# EAGLE board TwixBC (EAGLE 5.06)
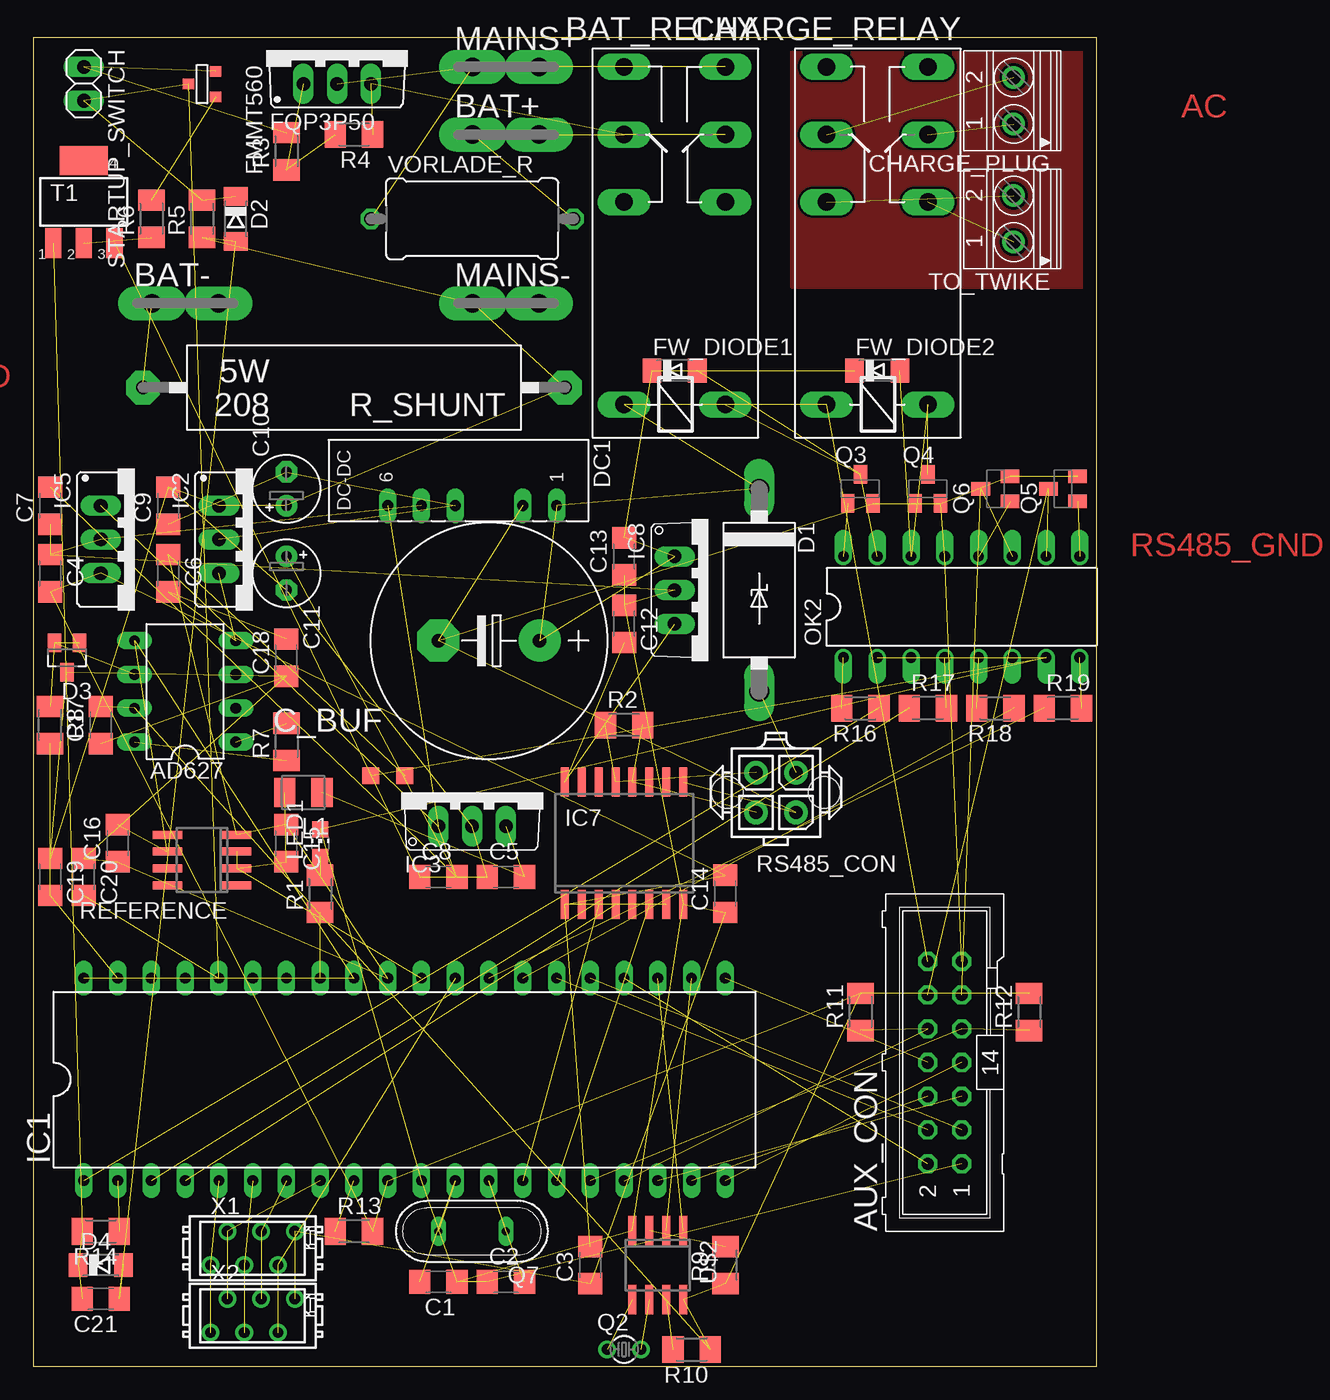
[diagram p0: board, top side]

Size 80 x 100 mm. Coordinates in mm from the lower left corner, seen from the top.
Outline: 0,0 80,0 80,100 0,100 0,0
Copper layers (1*16): Top 0.035mm / dielectric 1.5mm / Bottom 0.035mm
Design rules "default": minimum track width 10mil, minimum drill 24mil, track to track 8mil, track to pad 8mil, pad to pad 8mil, via to via 8mil, smd to smd 8mil, copper to edge 40mil, drill to drill 8mil, minimum pad ring 10mil, minimum via ring 8mil, stop-mask expansion 4mil, vias tented up to drill 0mil, thermal gap 10mil

## Footprints (pad centres in the part's own frame; a part is rotated, then mirrored left to right if it is on the bottom)
DIL08 = drill 0.813 long: 1 -3.81,-3.81; 2 -1.27,-3.81; 3 1.27,-3.81; 4 3.81,-3.81; 5 3.81,3.81; 6 1.27,3.81; 7 -1.27,3.81; 8 -3.81,3.81
ML14 = drill 0.914 octagon: 1 -7.62,-1.27; 2 -7.62,1.27; 3 -5.08,-1.27; 4 -5.08,1.27; 5 -2.54,-1.27; 6 -2.54,1.27; 7 0,-1.27; 8 0,1.27; 9 2.54,-1.27; 10 2.54,1.27; 11 5.08,-1.27; 12 5.08,1.27; 13 7.62,-1.27; 14 7.62,1.27
F061.100 = drill 1.4 pad 2.54 long: A1 -2.5,0; A2 2.5,0
F4052 = drill 1.321 long: 1 -3.81,3.81; 2 -3.81,-3.81; O1 11.43,-3.81; O2 11.43,3.81; P1 16.51,-3.81; P2 16.51,3.81; S1 21.59,-3.81; S2 21.59,3.81
C1206 = smd 1.6 x 1.8: 1 -1.4,0; 2 1.4,0
E2,5-5 = drill 0.813 pad 1.6 round: + -1.27,0 | drill 0.813 pad 1.6 octagon: - 1.27,0
E7,5-18 = drill 1.016 pad 3.15 round: + -3.81,0 | drill 1.016 pad 3.15 octagon: - 3.81,0
1751248 = drill 1.1 pad 1.7 round: 1 -1.75,-0.1; 2 1.75,-0.1
C4111-15 = drill 1.499 long: A 7.62,0; C -7.62,0
SOD80C = smd 1.4 x 1.8: A 1.7,0; C -1.7,0
SOT23 = smd 1 x 1.4: 1 -0.95,-1.1; 2 0.95,-1.1; 3 0,1.1
NMA = drill 0.813 long: 1 0,6.35; 2 0,3.81; 4 0,-1.27; 5 0,-3.81; 6 0,-6.35
SOT-23 = smd 0.787 x 0.889: 1 0.025,-1.016; 2 -0.94,1.016; 3 0.991,1.016
TO220BV = drill 1.016 long: D 0,-2.54; G -2.54,-2.54; S 2.54,-2.54
MINIMELF = smd 1.4 x 1.8: A 1.7,0; C -1.7,0
DIL40 = drill 0.813 long: 1 -24.13,-7.62; 2 -21.59,-7.62; 3 -19.05,-7.62; 4 -16.51,-7.62; 5 -13.97,-7.62; 6 -11.43,-7.62; 7 -8.89,-7.62; 8 -6.35,-7.62; 9 -3.81,-7.62; 10 -1.27,-7.62; 11 1.27,-7.62; 12 3.81,-7.62; 13 6.35,-7.62; 14 8.89,-7.62; 15 11.43,-7.62; 16 13.97,-7.62; 17 16.51,-7.62; 18 19.05,-7.62; 19 21.59,-7.62; 20 24.13,-7.62; 21 24.13,7.62; 22 21.59,7.62; 23 19.05,7.62; 24 16.51,7.62; 25 13.97,7.62; 26 11.43,7.62; 27 8.89,7.62; 28 6.35,7.62; 29 3.81,7.62; 30 1.27,7.62; 31 -1.27,7.62; 32 -3.81,7.62; 33 -6.35,7.62; 34 -8.89,7.62; 35 -11.43,7.62; 36 -13.97,7.62; 37 -16.51,7.62; 38 -19.05,7.62; 39 -21.59,7.62; 40 -24.13,7.62
79XXS = drill 1.016 long: GND -2.54,-2.54; IN 0,-2.54; OUT 2.54,-2.54
TO220V = drill 1.016 long: 1 -2.54,-2.54; 2 0,-2.54; 3 2.54,-2.54
78XXS = drill 1.016 long: GND 0,-2.54; IN -2.54,-2.54; OUT 2.54,-2.54
SO16W = smd 0.6 x 2.2: 1 -4.445,-4.6; 2 -3.175,-4.6; 3 -1.905,-4.6; 4 -0.635,-4.6; 5 0.635,-4.6; 6 1.905,-4.6; 7 3.175,-4.6; 8 4.445,-4.6; 9 4.445,4.6; 10 3.175,4.6; 11 1.905,4.6; 12 0.635,4.6; 13 -0.635,4.6; 14 -1.905,4.6; 15 -3.175,4.6; 16 -4.445,4.6
L3225M = smd 1.6 x 2.2: 1 -1.4,0; 2 1.4,0
CHIP-LED0805 = smd 1.2 x 1.2: A 0,-1.05; C 0,1.05
DIL16 = drill 0.813 offset: 1 -8.89,-3.81; 2 -6.35,-3.81; 3 -3.81,-3.81; 4 -1.27,-3.81; 5 1.27,-3.81; 6 3.81,-3.81; 7 6.35,-3.81; 8 8.89,-3.81; 9 8.89,3.81; 10 6.35,3.81; 11 3.81,3.81; 12 1.27,3.81; 13 -1.27,3.81; 14 -3.81,3.81; 15 -6.35,3.81; 16 -8.89,3.81
TC26V = drill 0.813 round: 1 -1.27,0; 2 1.27,0
SOT23-BEC = smd 1 x 1.4: B -0.95,-1.1; C 0,1.1; E 0.95,-1.1
QS = drill 0.61 long: 1 -2.54,0; 2 2.54,0
M1206 = smd 1.6 x 2: 1 -1.4,0; 2 1.4,0
KH208-8 = drill 1.016 pad 2.54 octagon: 1 -15.875,0; 2 15.875,0
SO08 = smd 0.6 x 2.2: 1 -1.905,-2.6; 2 -0.635,-2.6; 3 0.635,-2.6; 4 1.905,-2.6; 5 1.905,2.6; 6 0.635,2.6; 7 -0.635,2.6; 8 -1.905,2.6
794681-4 = drill 1 pad 1.778 round: 1 1.5,-1.5; 2 1.5,1.5; 3 -1.5,-1.5; 4 -1.5,1.5 | hole 2.4: 3.63,0; -3.67,0
1X02 = drill 1.016 long: 1 -1.27,0; 2 1.27,0
SOT223 = smd 1.219 x 2.235: 1 -2.311,-3.099; 2 0,-3.099; 3 2.311,-3.099 | smd 3.6 x 2.2: 4 0,3.099
S08 = smd 0.6 x 2.2: 1 0.635,1.21; 2 1.905,1.21; 3 3.175,1.21; 4 4.445,1.21; 5 4.445,6.41; 6 3.175,6.41; 7 1.905,6.41; 8 0.635,6.41
RDH/15 = drill 1.016 octagon: 1 -7.62,0; 2 7.62,0
MICROMATCH-6 = drill 0.813 round: 1 3.175,1.27; 2 1.905,-1.27; 3 0.635,1.27; 4 -0.635,-1.27; 5 -1.905,1.27; 6 -3.175,-1.27
GND-GNDA = smd 1.27 x 1.27: GND -1.27,0; GNDA 1.27,0

## Placement (x,y rotation side)
AD627  AD627  [DIL08]  11.43,50.8 90 top
AUX_CON  [ML14]  68.58,22.86 90 top
BAT+  PIN2F061.100  [F061.100]  35.56,92.71 0 top
BAT-  PIN2F061.100  [F061.100]  11.43,80.01 0 top
BAT_RELAY  4052  [F4052]  48.26,76.2 90 top
C1  18p  [C1206]  30.48,6.35 180 top
C2  18p  [C1206]  35.56,6.35 0 top
C3  100n  [C1206]  41.91,7.62 90 top
C4  100n  [C1206]  1.27,59.69 270 top
C5  100n  [C1206]  35.56,36.83 0 top
C6  100n  [C1206]  10.16,59.69 270 top
C7  100n  [C1206]  1.27,64.77 90 top
C8  100n  [C1206]  30.48,36.83 0 top
C9  100n  [C1206]  10.16,64.77 90 top
C10  10u  [E2,5-5]  19.05,66.04 90 top
C11  10u  [E2,5-5]  19.05,59.69 270 top
C12  100n  [C1206]  44.45,55.88 270 top
C13  100n  [C1206]  44.45,60.96 90 top
C14  100n  [C1206]  52.07,35.56 90 top
C15  100n  [C1206]  19.05,39.37 270 top
C16  100n  [C1206]  6.35,39.37 90 top
C17  100n  [C1206]  5.08,48.26 90 top
C18  100n  [C1206]  19.05,53.34 90 top
C19  100n  [C1206]  1.27,36.83 270 top
C20  100n  [C1206]  3.81,36.83 270 top
C21  100n  [C1206]  5.08,5.08 180 top
C_BUF  [E7,5-18]  34.29,54.61 180 top
CHARGE_PLUG  1751248  [1751248]  73.66,95.25 90 top
CHARGE_RELAY  4052  [F4052]  63.5,76.2 90 top
D1  1N5908  [C4111-15]  54.61,58.42 270 top
D2  [SOD80C]  15.24,86.36 270 top
D3  BAS40-06  [SOT23]  2.54,53.34 180 top
D4  [SOD80C]  5.08,7.62 0 top
DC1  12-12  [NMA]  33.02,64.77 270 top
FMMT560  [SOT-23]  12.7,96.52 270 top
FQP3P50  [TO220BV]  22.86,99.06 0 top
FW_DIODE1  [MINIMELF]  48.26,74.93 0 top
FW_DIODE2  [MINIMELF]  63.5,74.93 0 top
IC1  MEGA32-P  [DIL40]  27.94,21.59 0 top
IC2  TS7905  [79XXS]  16.51,62.23 270 top
IC3  7805TV  [TO220V]  33.02,43.18 0 top
IC5  TS7805  [78XXS]  7.62,62.23 270 top
IC7  ADM2483  [SO16W]  44.45,39.37 0 top
IC8  7805TV  [TO220V]  50.8,58.42 270 top
L1  [L3225M]  20.32,43.18 180 top
LED1  [CHIP-LED0805]  21.59,39.37 0 top
MAINS+  PIN2F061.100  [F061.100]  35.56,97.79 0 top
MAINS-  PIN2F061.100  [F061.100]  35.56,80.01 0 top
OK2  ILQ1  [DIL16]  69.85,57.15 0 top
Q2  32678 kHz  [TC26V]  44.45,1.27 0 top
Q3  BC817-16SMD  [SOT23-BEC]  62.23,66.04 0 top
Q4  BC817-16SMD  [SOT23-BEC]  67.31,66.04 0 top
Q5  BC817-16SMD  [SOT23-BEC]  77.47,66.04 90 top
Q6  BC817-16SMD  [SOT23-BEC]  72.39,66.04 90 top
Q7  16MHz  [QS]  33.02,10.16 180 top
R1  390  [M1206]  21.59,35.56 90 top
R2  120  [M1206]  44.45,48.26 0 top
R3  1990k  [M1206]  19.05,91.44 90 top
R4  100k  [M1206]  24.13,92.71 180 top
R5  10k  [M1206]  12.7,86.36 90 top
R6  1M  [M1206]  8.89,86.36 90 top
R7  17k8  [M1206]  19.05,46.99 90 top
R8  10k  [M1206]  1.27,48.26 270 top
R9  10k  [M1206]  52.07,7.62 90 top
R10  10k  [M1206]  49.53,1.27 180 top
R11  10k  [M1206]  62.23,26.67 90 top
R12  10k  [M1206]  74.93,26.67 90 top
R13  10k  [M1206]  24.13,10.16 0 top
R14  100k  [M1206]  5.08,10.16 180 top
R16  390  [M1206]  62.23,49.53 180 top
R17  390  [M1206]  67.31,49.53 0 top
R18  390  [M1206]  72.39,49.53 180 top
R19  390  [M1206]  77.47,49.53 0 top
R_SHUNT  0.005  [KH208-8]  24.13,73.66 180 top
REFERENCE  [SO08]  12.7,38.1 90 top
RS485_CON  794681-4  [794681-4]  55.88,43.18 0 top
STARTUP_SWITCH  [1X02]  3.81,96.52 270 top
T1  [SOT223]  3.81,87.63 0 top
TO_TWIKE  1751248  [1751248]  73.66,86.36 90 top
U$2  DS1629  [S08]  49.53,11.43 180 top
VORLADE_R  [RDH/15]  33.02,86.36 0 top
X1  MICROMATCH-6  [MICROMATCH-6]  16.51,8.89 0 top
X2  MICROMATCH-6  [MICROMATCH-6]  16.51,3.81 0 top
~NUDEV~1  GND-GNDA  [GND-GNDA]  26.67,44.45 0 top

## Library data of the parts
AD627 = analog-devices
AUX_CON = con-ml
BAT+ BAT- MAINS+ MAINS- = con-faston
BAT_RELAY CHARGE_RELAY = relay
C1-C21 C_BUF L1 R1-R14 R16-R19 VORLADE_R = rcl
CHARGE_PLUG TO_TWIKE = con-phoenix-350
D1-D4 FW_DIODE1 FW_DIODE2 = diode
DC1 = dc-dc-converter
FMMT560 T1 = zetex
FQP3P50 = transistor-power
IC1 = atmel
IC2 IC5 = v-reg
IC3 IC8 = linear
IC7 REFERENCE = Libs_Markus
LED1 = led
OK2 = optocoupler
Q2 = crystal
Q3-Q6 = transistor-npn
Q7 = special
R_SHUNT = resistor-power
RS485_CON = con-amp
STARTUP_SWITCH = pinhead
U$2 = DS1629
X1 X2 = con-amp-micromatch
~NUDEV~1 = supply1

## Nets
ADC_HV: C20.2 D2.C FMMT560.1 IC1.36 R5.2 STARTUP_SWITCH.2
AUX: AUX_CON.12 OK2.10 Q5.C
AUX_EN: IC1.28 R19.1
BAT_RELAY_EN: IC1.1 R16.1
BUT_1: AUX_CON.9 IC1.16 R12.1
BUT_2: AUX_CON.10 IC1.17 R11.1
CHARGE_RELAY_EN: IC1.3 R17.1
CS: IC1.5 X1.6 X2.6
DISP_DB4: AUX_CON.5 IC1.18
DISP_DB5: AUX_CON.6 IC1.19
DISP_DB6: AUX_CON.7 IC1.20
DISP_DB7: AUX_CON.8 IC1.21
DISP_EN_PWR: AUX_CON.4 IC1.26
DISP_RS: AUX_CON.2 IC1.24
DISP_RW: AUX_CON.3 IC1.25
GND: AUX_CON.1 C1.1 C2.1 C3.1 C4.1 C7.1 C12.1 C13.1 C14.1 DC1.5 IC1.11 IC5.GND IC7.8 IC8.2 LED1.C OK2.2 OK2.3 OK2.6 OK2.7 U$2.4 X1.1 X2.1 ~NUDEV~1.GND
GNDA: C5.1 C6.1 C8.1 C9.2 C10.+ C11.- C15.1 C16.1 C17.1 C18.1 C19.1 C20.1 C21.1 D2.A D3.3 D4.A IC1.31 IC2.GND IC3.2 MAINS-.A1 R5.1 R_SHUNT.1 REFERENCE.4 T1.3 ~NUDEV~1.GNDA
ISO_EN: IC1.29 X1.2 X2.2
MAINS+: BAT_RELAY.S1 BAT_RELAY.S2 FQP3P50.D MAINS+.A1 VORLADE_R.1
MISO: IC1.7 X1.3 X2.3
MOSI: IC1.6 X1.4 X2.4
N$1: IC1.33 R1.1
N$2: FMMT560.2 R3.2 STARTUP_SWITCH.1
N$3: FMMT560.3 R6.2
N$4: FQP3P50.G R3.1 R4.2
N$5: R6.1 T1.2
N$8: C21.2 D4.C R14.2 T1.1
N$18: C1.2 IC1.12 Q7.2
N$22: C2.2 IC1.13 Q7.1
N$24: BAT+.A1 BAT+.A2 BAT_RELAY.P1 BAT_RELAY.P2 FQP3P50.S R4.1 VORLADE_R.2
N$25: BAT_RELAY.2 FW_DIODE1.A OK2.15 Q3.C
N$26: IC7.12 R2.2 RS485_CON.3
N$27: IC7.13 R2.1 RS485_CON.4
N$28: C12.2 IC7.16 IC8.3
N$29: C15.2 IC1.30 L1.2 REFERENCE.2 REFERENCE.3
N$30: AD627.6 D3.1 D3.2 R8.1
N$31: C7.2 C8.2 C11.+ DC1.6 IC3.1 IC5.IN
N$32: C9.1 C10.- DC1.4 IC2.IN
N$33: AD627.1 R7.2
N$34: AD627.8 R7.1
N$35: C19.2 IC1.37 IC1.39 R8.2
N$36: R10.2 U$2.7
N$37: R9.2 U$2.3
N$38: IC1.9 R13.1
N$40: Q2.2 U$2.6
N$41: Q2.1 U$2.5
N$42: OK2.16 Q3.B
N$43: OK2.1 R16.2
N$44: OK2.4 R17.2
N$45: CHARGE_PLUG.1 CHARGE_RELAY.P1
N$46: CHARGE_PLUG.2 CHARGE_RELAY.P2
N$47: CHARGE_RELAY.2 FW_DIODE2.A OK2.14 Q4.C
N$48: CHARGE_RELAY.O1 TO_TWIKE.1
N$49: CHARGE_RELAY.O2 TO_TWIKE.2
N$50: OK2.5 R18.2
N$52: OK2.8 R19.2
N$53: LED1.A R1.2
N$54: OK2.9 Q5.B
N$65: OK2.12 Q6.B
NOTAUS: AUX_CON.11 OK2.11 Q6.C
NOTAUS_EN: IC1.27 R18.1
RS485_INPUT_DE: IC1.4 IC7.4 IC7.5
RXD: IC1.14 IC7.3
SCK: IC1.8 X1.5 X2.5
SCL: IC1.22 U$2.2
SDA: IC1.23 U$2.1
SOFT_SW_EN: IC1.2 R14.1
TWIKE_DCDC+: D1.A RS485_CON.2
TWIKE_DCDC-: AUX_CON.13 C_BUF.- DC1.2 IC7.9 OK2.13 Q3.E Q4.B Q4.E Q5.E Q6.E RS485_CON.1
TWIKE_DCDC_BUF: AUX_CON.14 BAT_RELAY.1 C13.2 C_BUF.+ CHARGE_RELAY.1 D1.C DC1.1 FW_DIODE1.C FW_DIODE2.C IC8.1
TXD: IC1.15 IC7.6
U_REF: AD627.5 C16.2 IC1.32 IC1.38 IC1.40 REFERENCE.6
U_SHUNT: BAT-.A1 R_SHUNT.2
VCC: AD627.7 C3.2 C4.2 C14.2 C17.2 IC1.10 IC5.OUT IC7.1 IC7.7 R9.1 R10.1 R11.2 R12.2 R13.2 U$2.8
VDD: C5.2 IC3.3 L1.1
VSS: AD627.4 C6.2 C18.2 IC2.OUT

## Tracks (layer width: path | path; a pad name or v marks a point on that pad's centre or on a via)
ADC_HV  (5 unrouted)
AUX  (2 unrouted)
AUX_EN  (1 unrouted)
BAT_RELAY_EN  (1 unrouted)
BUT_1  (2 unrouted)
BUT_2  (2 unrouted)
CHARGE_RELAY_EN  (1 unrouted)
CS  (2 unrouted)
DISP_DB4  (1 unrouted)
DISP_DB5  (1 unrouted)
DISP_DB6  (1 unrouted)
DISP_DB7  (1 unrouted)
DISP_EN_PWR  (1 unrouted)
DISP_RS  (1 unrouted)
DISP_RW  (1 unrouted)
GND  (22 unrouted)
GNDA  (24 unrouted)
ISO_EN  (2 unrouted)
MAINS+  (4 unrouted)
MISO  (2 unrouted)
MOSI  (2 unrouted)
N$1  (1 unrouted)
N$2  (2 unrouted)
N$3  (1 unrouted)
N$4  (2 unrouted)
N$5  (1 unrouted)
N$8  (3 unrouted)
N$9
  pour Top: 57.15,100.33 57.15,81.28 80.01,81.28 80.01,100.33 58.42,100.33
N$18  (2 unrouted)
N$22  (2 unrouted)
N$24  (6 unrouted)
N$25  (3 unrouted)
N$26  (2 unrouted)
N$27  (2 unrouted)
N$28  (2 unrouted)
N$29  (4 unrouted)
N$30  (3 unrouted)
N$31  (5 unrouted)
N$32  (3 unrouted)
N$33  (1 unrouted)
N$34  (1 unrouted)
N$35  (3 unrouted)
N$36  (1 unrouted)
N$37  (1 unrouted)
N$38  (1 unrouted)
N$40  (1 unrouted)
N$41  (1 unrouted)
N$42  (1 unrouted)
N$43  (1 unrouted)
N$44  (1 unrouted)
N$45  (1 unrouted)
N$46  (1 unrouted)
N$47  (3 unrouted)
N$48  (1 unrouted)
N$49  (1 unrouted)
N$50  (1 unrouted)
N$52  (1 unrouted)
N$53  (1 unrouted)
N$54  (1 unrouted)
N$65  (1 unrouted)
NOTAUS  (2 unrouted)
NOTAUS_EN  (1 unrouted)
RS485_INPUT_DE  (2 unrouted)
RXD  (1 unrouted)
SCK  (2 unrouted)
SCL  (1 unrouted)
SDA  (1 unrouted)
SOFT_SW_EN  (1 unrouted)
TWIKE_DCDC+  (1 unrouted)
TWIKE_DCDC-  (10 unrouted)
TWIKE_DCDC_BUF  (9 unrouted)
TXD  (1 unrouted)
U_REF  (5 unrouted)
U_SHUNT  (1 unrouted)
VCC  (14 unrouted)
VDD  (2 unrouted)
VSS  (3 unrouted)

## Text on the board
Top: AC | AGND | RS485_GND | DGND